# Altium PCB nrf52805_caaa_dcdc.PcbDoc
Units mm, origin at the board's own origin, x right, y up, seen from the top; angles counter-clockwise.
Board outline 9.5 x 8.75 mm, 2 copper layers (Top Layer, Bottom Layer), stack 0.782 mm thick; 17 components, 23 nets, 66 pads, 30 vias.
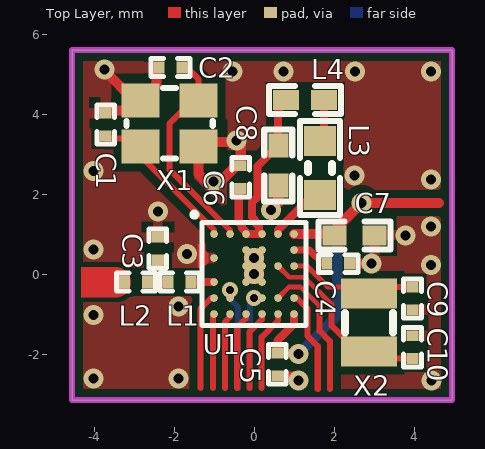
[diagram p0: Top Layer view]
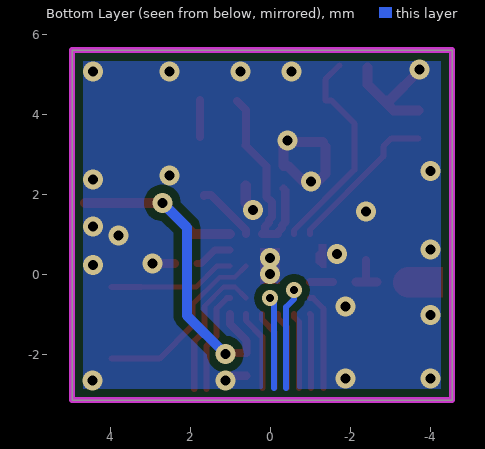
[diagram p1: Bottom Layer view, seen from below]
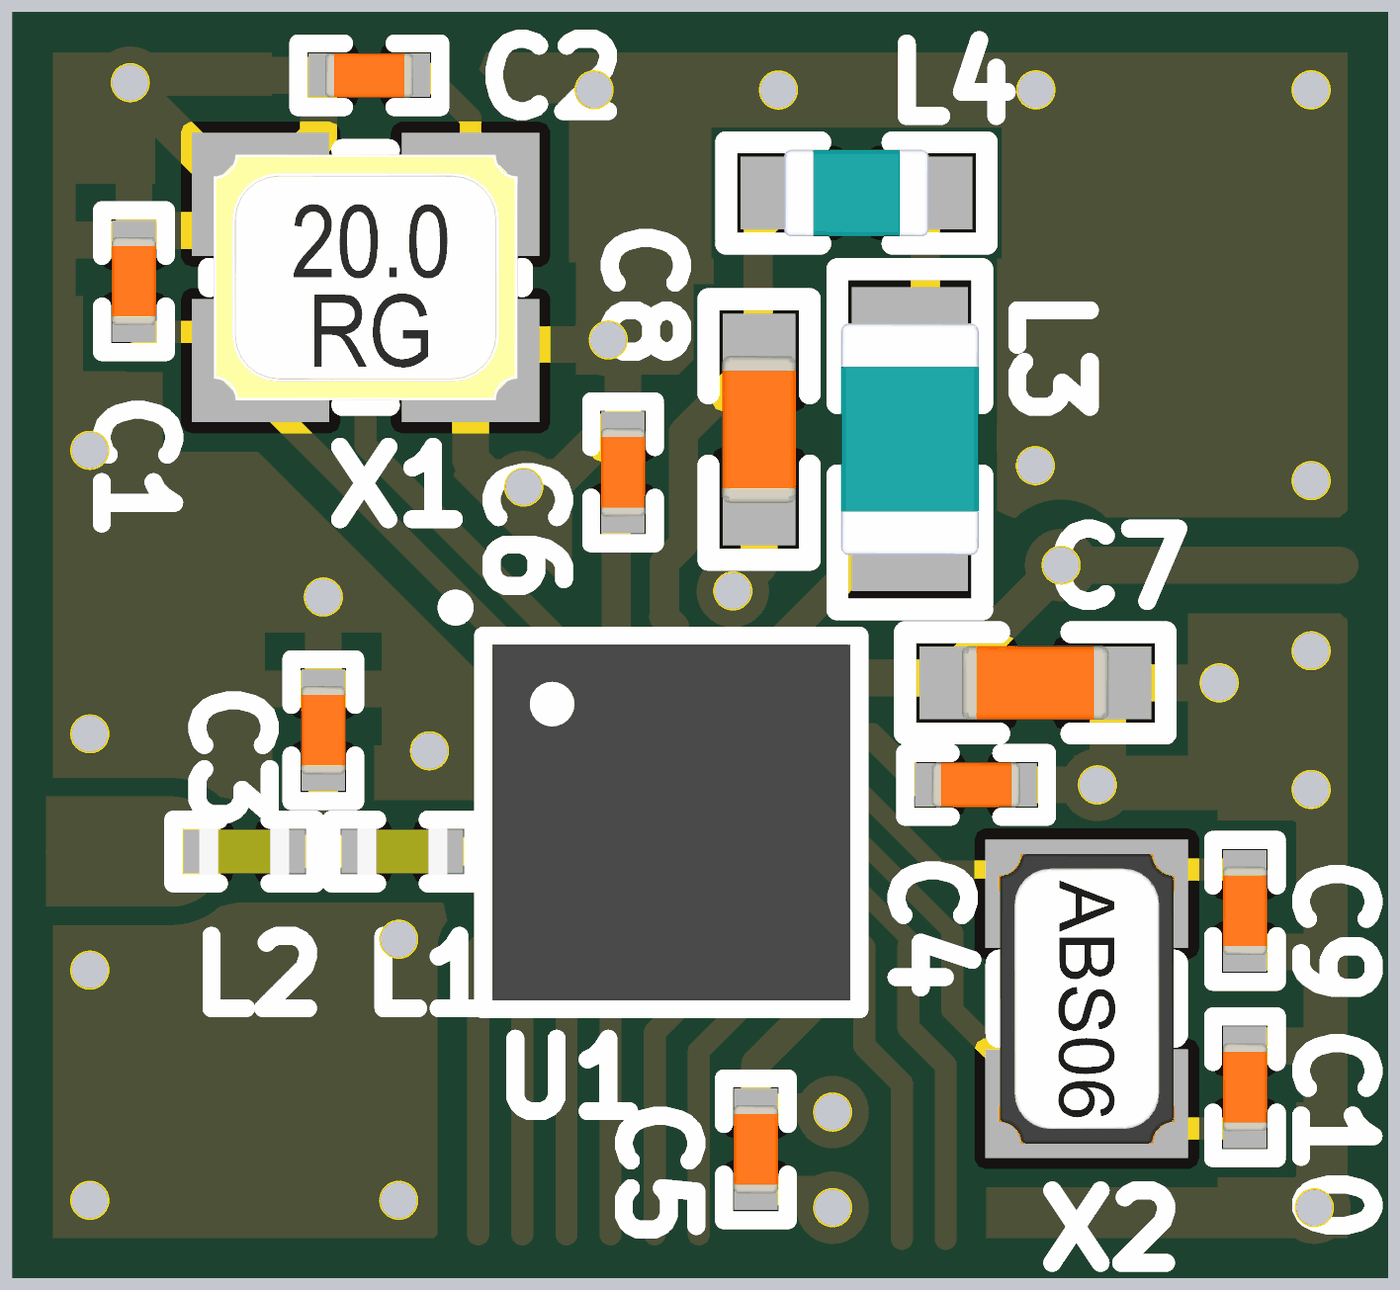
[diagram p2: 3D render of the assembled board from above, using the file's embedded part models]

## Layer stack, top to bottom
Top Solder: solder mask 0.0102, Solder Resist, Dk 3.5
Top Layer: signal copper 0.0356
Dielectric2: core 0.7112, Core-039, Dk 4.8
Bottom Layer: signal copper 0.0356
Bottom Solder: solder mask 0.0102, Solder Resist, Dk 3.5

## Board outline
-4.55,-3.15 4.95,-3.15 4.95,5.6 -4.55,5.6

## Design rules (kind name [scope] priority, off if disabled: settings)
Clearance Polygon_ANT [(InNamedPolygon('Top_Layer-GND')) or (InNamedPolygon('Bottom_Layer-GND')) vs InNet('RF')] p1: gap=0.127 ignorepadtopadclearanceinfootprint=FALSE except(0: Arc-Hole Track-Hole SMDPad-Hole THPad-Hole Via-Hole Fill-Hole Poly-Hole Region-Hole Text-Hole)
Clearance Polygon [(InNamedPolygon('Top_Layer-GND')) or (InNamedPolygon('Bottom_Layer-GND')) or (InNamedPolygon('Mid_Layer_1-GND')) or (InNamedPolygon('Mid_Layer_2-GND'))] p2: gap=0.203 ignorepadtopadclearanceinfootprint=FALSE except(0: Arc-Hole Track-Hole SMDPad-Hole THPad-Hole Via-Hole Fill-Hole Poly-Hole Region-Hole Text-Hole)
Clearance [All] p3: gap=0.121 ignorepadtopadclearanceinfootprint=FALSE
ComponentClearance [All] p1 off: gap=0.254 collisioncheckmode=3 verticalgap=0.254 showdistances=FALSE
FabricationTestPointUsage TestPointUsage [All] p1: valid=0 allowmultiple=FALSE
FabricationTestpoint Testpoint [All] p1: side=3 testpointundercomponent=TRUE minsize=1.016 maxsize=2.54 preferedsize=1.524 minholesize=0 maxholesize=1.016 preferedholesize=0.813 testpointgrid=0.025 allowsidetop=TRUE allowsidebottom=TRUE usegrid=TRUE gridtolerance=0
Height [All] p1 off: minheight=0 maxheight=25.4 prefheight=12.7
HoleSize [All] p1: absolutevalues=TRUE maxlimit=4.064 minlimit=0.076 maxpercent=80.000 minpercent=20.000
HoleToHoleClearance [All] p1 off: gap=0.076 allowstackedmicrovias=FALSE
MinimumAnnularRing [All] p1 off: minimumring=0.1
PolygonConnect PolygonConnect_1 [isVia and innet(gnd)] p1: connectstyle=Direct reliefconductorwidth=0.254 reliefentries=4 polygonreliefangle="90 Angle" airgapwidth=0.254
PolygonConnect [All] p2: connectstyle=Relief reliefconductorwidth=0.254 reliefentries=4 polygonreliefangle="90 Angle" airgapwidth=0.254
RoutingVias [All] p1: holewidth=0.406 width=0.813 viastyle="Through Hole" minholewidth=0.1 minwidth=0.25 maxholewidth=0.711 maxwidth=1.27
SilkToSolderMaskClearance SilkscreenOverComponentPads [IsPad] p1: minsilkscreentomaskgap=0.254 clearancetoexposedcopper=TRUE
SolderMaskExpansion [All] p1: expansion=0.076
Width [All] p1: maxlimit=2.54 minlimit=0.121 preferedwidth=0.15
23 further rules are at their usual default settings.

## Components (designator, comment, footprint, x,y, rotation, side; value= is the part's Value field where it differs from the comment)
C1 "12pF" CAPC0603X03L_C -3.712,3.74 r270 top
C2 "12pF" CAPC0603X03L_C -2.086,5.163 r0 top
C3 "1.2pF" CAPC0603X03L_C -2.404,0.638 r270 top
C4 "100nF" CAPC0603X03L_C 2.105,0.26 r0 top
C5 "100nF" CAPC0603X03L_C 0.584,-2.257 r270 top
C6 "100pF" CAPC0603X03L_C -0.333,2.419 r270 top
C7 "2.2µF" CAPC1005X04L 2.515,0.965 r0 top
C8 "1.0µF" CAPC1005X04L 0.606,2.716 r90 top
C9 "12pF" CAPC0603X03L_C 3.962,-0.61 r90 top
C10 "12pF" CAPC0603X03L_C 3.962,-1.829 r270 top
L1 "2.2nH" INDC0603X03L_C -1.857,-0.2 r180 top
L2 "3.3nH" INDC0603X03L_C -2.95,-0.2 r180 top
L3 "10µH" INDC1608X06L 1.648,2.648 r270 top
L4 "15nH" INDC1005X04L 1.279,4.35 r0 top
U1 "nRF52805-CAAA" BGA28C40P6X6_247X246X50 0,0 r0 top
X1 "32MHz" BT-XTAL_2016 -2.111,3.766 r0 top
X2 "32.768kHz" XTAL_2012 2.87,-1.217 r270 top

## Footprints (in the part's own frame and the unit in brackets; to place one, negate y for a bottom-side part, rotate by r counter-clockwise, add the part's x,y. Pads: shape width x height; smd on the part's side, far side on the other; paste and mask are expansions set on the pad)
BGA28C40P6X6_247X246X50 [mm] "BGA, 28-Leads, Body 2.47x2.46mmx0.50mm, Pitch 0.40mm"
  round 0.194 smd mask+0.05: A1(-1,1) A2(-0.6,1) A3(-0.2,1) A4(0.2,1) A5(0.6,1) A6(1,1) B3(-0.2,0.6) B4(0.2,0.6) B6(1,0.6) C1(-1,0.4) D3(-0.2,0.2) D4(0.2,0.2) D5(0.6,0.2) D6(1,0.2) E1(-1,-0.2) E3(-0.2,-0.2) E4(0.2,-0.2) F1(-1,-0.6) F2(-0.6,-0.6) F4(0.2,-0.6) F5(0.6,-0.6) F6(1,-0.6) G1(-1,-1) G2(-0.6,-1) G3(-0.2,-1) G4(0.2,-1) G5(0.6,-1) G6(1,-1)
  silkscreen extent -1.55,-1.29 1.3,1.55, body extent -1.23,-1.23 1.23,1.23, height 0.5
BT-XTAL_2016 [mm] "Crystal 2.0 x 1.6 mm"
  rect 0.95x0.85 smd: 1(-0.725,-0.575) 2(0.725,-0.575) 3(0.725,0.575) 4(-0.725,0.575)
  silkscreen extent -1.08,-0.88 1.08,0.88, body extent -1.05,-0.85 1.05,0.85, height 0.56
CAPC0603X03L_C [mm] "Chip Capacitor, 2-Leads, Body 0.6x0.3mm, IPC High Density"
  rect 0.27x0.3 smd: 1(-0.285,0) 2(0.285,0)
  silkscreen extent -0.49,-0.22 0.49,0.22, body extent -0.3,-0.15 0.31,0.15, height 0.3
CAPC1005X04L [mm] "Chip Capacitor, 2-Leads, Body 1.0x0.5mm, IPC High Density"
  rect 0.6x0.5 smd: 1(-0.5,0) 2(0.5,0)
  silkscreen extent -0.9,-0.35 0.9,0.35, body extent -0.51,-0.25 0.51,0.25, height 0.5
INDC0603X03L_C [mm] "Chip Inductor, 2-Leads, Body 0.6x0.3mm, IPC High Density"
  rect 0.27x0.3 smd: 1(-0.285,0) 2(0.285,0)
  silkscreen extent -0.49,-0.22 0.49,0.22, body extent -0.31,-0.16 0.31,0.16, height 0.26
INDC1005X04L [mm] "Chip Inductor, 2-Leads, Body 1.0x0.5mm, IPC High Density"
  rect 0.65x0.5 smd: 1(-0.475,0) 2(0.475,0)
  silkscreen extent -0.9,-0.35 0.9,0.35, body extent -0.5,-0.3 0.5,0.3, height 0.5
INDC1608X06L [mm] "Chip Inductor, 2-Leads, Body 1.6x0.8mm, IPC High Density"
  rect 0.75x0.8 smd: 1(-0.675,0) 2(0.675,0)
  silkscreen extent -1.17,-0.5 1.17,0.5, body extent -0.8,-0.48 0.8,0.48, height 0.8
XTAL_2012 [mm] "XTAL SMD 2.0 x 1.2 mm"
  rect 0.75x1.4 smd: 1(-0.725,0) 2(0.725,0)
  silkscreen extent -0.24,-0.6 0.24,0.6, body extent -1,-0.61 1,0.61, height 0.6

## Part data
C1 C2 C9 C10: library part C0201-12p, "Capacitor, NP0, ±2%", Footprint Doc=0201, LatestRevisionDate=2017-11-09, Part Number=C0201-12p, Pin Count=2, Published=2014-11-13, Publisher="Nordic Semiconductor"
C3: library part C0201-1.2p, "Capacitor, NP0, ±5%", Footprint Doc=0201, LatestRevisionDate=2014-11-13, Part Number=C0201-1.2p, Pin Count=2, Published=2014-11-13, Publisher="Nordic Semiconductor"
C4 C5: library part C0201-100n, "Capacitor, X5R, ±10%", Footprint Doc=0201, LatestRevisionDate=2017-11-09, Part Number=C0201-100n, Pin Count=2, Published=2014-11-13, Publisher="Nordic Semiconductor"
C6: library part C0201-100p, "Capacitor, NP0, ±2%", Footprint Doc=0201, LatestRevisionDate=2017-11-09, Part Number=C0201-100p, Pin Count=2, Published=2014-11-13, Publisher="Nordic Semiconductor"
C7: library part C0402-2µ2, "Capacitor, X5R, ±20%", Part number IPS=N.A., Supplier Part Number 1=490-10457-1-ND, Artikkelnr Noca=20030006, ComponentLink1Description=Datasheet, ComponentLink2Description="Supplier link", Footprint Doc=0402, LatestRevisionDate=2006-06-02, Note=25V, Part Number=C0402-2µ2, Pin Count=2, Published=2009-05-08, Publisher="Nordic Semiconductor", Supplier 1=Digi-Key
C8: library part C0402-1µ0, "Capacitor, X5R, ±5%", Footprint Doc=0402, LatestRevisionDate=2016-08-22, Part Number=C0402-1µ0, Pin Count=2, Published=2009-05-08, Publisher="Nordic Semiconductor"
L1: library part L0201-2n2, "High frequency chip inductor ±5%", Footprint Doc=0201, LatestRevisionDate=2013-04-10, Part Number=L0201-2n2, Pin Count=2, Published=2013-04-10, Publisher="Nordic Semiconductor"
L2: library part L0201-3n3, "High frequency chip inductor ±5%", Footprint Doc=0201, LatestRevisionDate=2013-04-10, Part Number=L0201-3n3, Pin Count=2, Published=2013-04-10, Publisher="Nordic Semiconductor"
L3: library part L0603-10µ, "Chip inductor, IDC,min = 50 mA, ±20%", Footprint Doc=0603, LatestRevisionDate=2012-09-19, Part Number=L0603-10µ, Pin Count=2, Published=2010-02-24, Publisher="Nordic Semiconductor"
L4: library part L0402-15n, "High frequency chip inductor ±10%", Footprint Doc=0402, LatestRevisionDate=2012-09-19, Part Number=L0402-15n, Pin Count=2, Published=2010-07-12, Publisher="Nordic Semiconductor"
U1: "Multi-protocol Bluetooth Low Energy, IEEE 802.15.4, ANT and 2.4GHz proprietary system-on-chip", Manufacturer="Nordic Semiconductor", Part number IPS=N.A., Artikkelnr Noca=N.A., ComponentLink1Description=Datasheet, ComponentLink2Description="Supplier link", Footprint Doc=WLCSP-28, LatestRevisionDate=2018-11-28, Manufacturer Part Number=nRF52805-CAAA, Note="nRF52805 - WLSCP-28 2.5 x 2.5 0.4mm pitch", Part Number=nRF52805-CAAA, Pin Count=28, Published=2018-11-28, Publisher="Nordic Semiconductor", Supplier 1="Nordic Semiconductor", Supplier Part Number 1=nRF52805-CAAA
X1: library part XTAL_SMD2016_32MHz_8pF_General, "XTAL SMD 2016, 32MHz, Cl=8pF, Total Tol: ±40ppm", Footprint Doc=XTAL_2016, LatestRevisionDate=2016-08-19, Part Number=XTAL_SMD2016_32MHz_8pF_General, Pin Count=4, Published=2016-08-19, Publisher="Nordic Semiconductor"
X2: library part XTAL_SMD2012_32.768kHz_9pF_General, "XTAL SMD 2012, 32.768kHz, Cl=9pF, Total Tol: ±50ppm", Footprint Doc=XTAL_2012, LatestRevisionDate=2017-01-11, Part Number=XTAL_SMD2012_32.768kHz_9pF_General, Pin Count=2, Published=2016-08-19, Publisher="Nordic Semiconductor"

## Free pads (board coordinates)
  round 0.5 on Mech16: 1(0,0.4) 2(0,0)
  round 0.4 on Mech16: 2(-0.6,-0.4) 2(0,-0.6)

## Via types
v1: diameter 0.5, hole 0.25, Top Layer to Bottom Layer, tented both sides, 28 vias
v2: diameter 0.4, hole 0.2, Top Layer to Bottom Layer, tented both sides, 2 vias

## Nets (pads, with @x,y where several pads share a name; then routed paths per layer and width w, separated by ;. In a path a pad name is that pad's centre, name@x,y a point inside that pad or via, vN(x,y) a via of type N, cw(c..) or ccw(c..) an arc to the next point about the centre after c; other vN are vias at no path point)
DEC1: C4.1 U1.B6 | length 1
  Top Layer w0.178: U1.B6 1.381,0.6 1.721,0.26 C4.1
DEC4_2: C6.2 C8.2 L4.1 U1.A3 U1.A4 | length 5.4
  Top Layer w0.203: C6.2 -0.381,2.087 -0.381,1.295 -0.301,1.215 -0.301,1.153 -0.2,1.052 U1.A3 U1.A4 0.124,1.076 0.124,1.186 0.023,1.287 0.023,1.349 -0.051,1.424 ; -0.048,1.427 -0.048,1.796 0.083,1.927 0.083,2.693 C8.2 ; C8.2@0.6,3.216 0.6,4.103 L4.1@0.821,4.324
GND: C1.1 C2.1 C3.1 C4.2 C5.2 C6.1 C7.2 C8.1 C9.1 C10.1 U1.B3 U1.B4 U1.C1 U1.D3 U1.D4 U1.E3 U1.E4 X1.2 X1.4 | length 8.5
  Top Layer w0.203: C5.2 0.996,-2.542 v1(1.114,-2.661)
  Top Layer w0.229: C4.2 v1(2.943,0.26)
  Top Layer w0.254: v1@-3.737,5.086 -2.991,4.341 X1.4 ; C1.1@-3.712,4.09 -3.087,4.09 X1.4 ; C2.1@-2.436,5.163 -2.436,4.741 X1.4 ; X1.2 -1.386,2.507 -1.197,2.318 v1(-1.019,2.318) -0.832,2.318 -0.445,2.704 C6.1 -0.333,3.232 v1(-0.435,3.334) -0.467,3.302 X1.2@-1.321,3.302 ; v1(0.425,1.6) 0.606,1.781 C8.1
  other v1: 4.442,-2.661 -4.016,-2.61 -1.883,-2.61 -4.016,-1.019 -1.883,-0.806 0,0 4.42,0.229 0,0.4 -1.67,0.496 -4.016,0.613 3.785,0.965 4.42,1.186 -2.404,1.558 4.42,2.362 2.515,2.466 -4.016,2.572 -0.533,5.062 0.74,5.061 2.519,5.062 4.42,5.062 -3.737,5.112
NetC3_2: C3.2 L1.2 L2.1 | length 1.1
  Top Layer w0.203: -2.416,-0.2 -2.404,-0.187 C3.2
  Top Layer w0.229: L2.1@-2.677,-0.2 L2.1 -2.416,-0.2 L1.2@-2.149,-0.2
NetL1_1: L1.1 U1.E1 | length 0.6
  Top Layer w0.194: L1.1 U1.E1
NetL3_1: L3.1 L4.2 | length 0.9
  Top Layer w0.203: L3.1@1.754,3.429 L4.2
NetL3_2: L3.2 U1.A5 | length 1.5
  Top Layer w0.203: U1.A5 0.6,1.1 1.473,1.973 L3.2 ; L3.2@1.648,1.948 L3.2@1.654,1.948
P0.00/XL1: C9.2 U1.D6 X2.1 | length 3.2
  Top Layer w0.125: U1.D6 1.324,0.2 1.848,-0.325 X2.1@3.226,-0.325
  Top Layer w0.152: X2.1@3.226,-0.325 C9.2
P0.01/XL2: C10.2 U1.D5 X2.2 | length 5.8
  Top Layer w0.121: U1.D5 0.88,-0.079 1.179,-0.079 ; 1.158,-0.079 1.179,-0.079 ; 1.941,-0.762 1.258,-0.079 1.179,-0.079
  Top Layer w0.152: 1.941,-0.762 1.941,-1.294 ; C10.2 X2.2@2.76,-2.114 ; 1.941,-1.294 X2.2@2.76,-2.114 ; 1.941,-1.294 X2.2@2.76,-2.114
P0.04/AIN2: U1.F5 | length 3.5
  Top Layer w0.121: U1.F5 0.878,-0.322 1.158,-0.322 1.638,-0.802 1.638,-0.85
  Top Layer w0.152: 1.638,-0.85 1.638,-1.42 1.895,-1.677 1.895,-2.876
P0.05/AIN3: U1.F6 | length 2.6
  Top Layer w0.152: U1.F6 1.072,-0.6 1.334,-0.862 1.334,-1.543 1.593,-1.802 1.593,-2.876
P0.12: U1.G5 | length 2
  Top Layer w0.152: 0.19,-2.845 0.19,-1.577 0.6,-1.167 U1.G5
P0.14: U1.F4 | length 2.3
  Bottom Layer w0.152: -0.098,-2.848 -0.098,-0.698 v2(0,-0.6)
P0.16: U1.G4 | length 2
  Top Layer w0.152: -0.114,-2.845 -0.114,-1.45 0.2,-1.136 U1.G4
P0.18: U1.G3 | length 1.9
  Top Layer w0.152: -0.419,-2.845 -0.419,-1.324 -0.2,-1.105 U1.G3
P0.20: U1.F2 | length 2.5
  Bottom Layer w0.152: v2(-0.6,-0.4) -0.6,-0.629 -0.4,-0.829 -0.4,-2.848
P0.21/R\E\S\E\T\: U1.G2 | length 1.9
  Top Layer w0.152: -0.724,-2.845 -0.724,-1.196 -0.6,-1.072 U1.G2
RF: L2.2 | length 0.5
  Top Layer w0.762: -3.94,-0.2 -3.458,-0.2
SWDCLK: U1.G1 | length 1.9
  Top Layer w0.152: -1.029,-2.845 -1.029,-1.029 U1.G1
SWDIO: U1.F1 | length 2.4
  Top Layer w0.152: -1.334,-2.845 -1.334,-0.862 -1.072,-0.6 U1.F1
VDD_NRF: C5.1 C7.1 U1.A6 U1.G6 | length 10.1
  Top Layer w0.203: C5.1 1.188,-1.972 v1@1.216,-2 ; C5.1@0.584,-1.907 0.584,-1.667 1,-1.251 U1.G6
  Top Layer w0.254: U1.A6 1.914,1 v1(2.692,1.778) 4.62,1.778
  Bottom Layer w0.254: v1(1.114,-2) 2.08,-1.035 2.08,1.165 v1(2.692,1.778)
XC1: C1.2 U1.A1 X1.1 | length 3.9
  Top Layer w0.152: C1.2@-3.712,3.39 -3.036,3.39 X1.1 -2.836,2.941 -1,1.105 U1.A1
XC2: C2.2 U1.A2 X1.3 | length 5.4
  Top Layer w0.152: C2.2@-1.736,5.213 -1.386,4.864 X1.3 -1.536,4.341 -2.111,3.766 -2.111,2.603 -0.6,1.091 U1.A2

## Polygon pours and split planes (outlines as drawn)
GND on Bottom Layer "Bottom_Layer-GND" (solid, remove dead copper, pour order 8): -5.788,-4.667 -5.788,6.001 6.683,6.001 6.683,-4.667
GND on Top Layer "Top_Layer-GND" (solid, remove dead copper, pour order 5): -5.788,-4.667 -5.788,6.001 6.683,6.001 6.683,-4.667

## Keep-outs
Keep-Out Layer:
  the board outline again, w0.152

## Other copper
Top Layer:
  rectangle net GND: -0.25,-0.25 0.25,0.65
  rectangle net RF: -4.32,-0.581 -3.94,0.181
  pour cut-out: 2.248,2.007 2.248,3.15 1.867,3.15 1.867,2.007
  region net GND: -1.222,0.748 -1.222,0.59 -1.146,0.514 -1.146,0.286 -1.279,0.153 -1.409,0.153 -1.409,0.727 -1.426,0.743
  pour cut-out: -0.943,0.997 -0.943,-0.146 -0.562,-0.146 -0.562,0.997

## Silkscreen, mask and mechanical layers (free items; w line width, h text height)
Mechanical 1:
  the board outline again, w0.152

## Dimensions
4.95,5.6 to 4.95,-3.15 on Mechanical 3
-4.55,-3.15 to 4.95,-3.15 on Mechanical 3